# EAGLE board mapleCUx_large_042b (EAGLE 7.3.0)
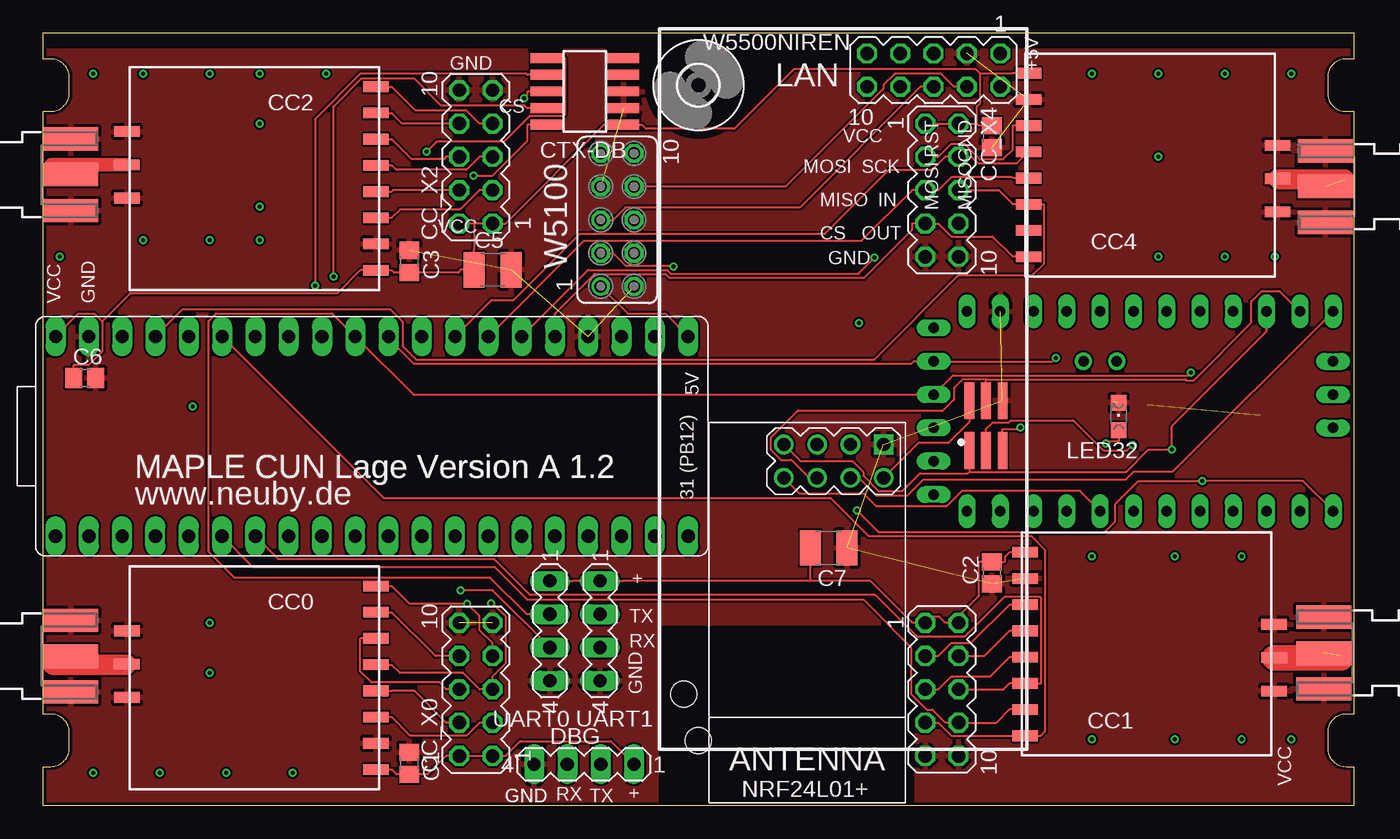
[diagram p0: board, top side]
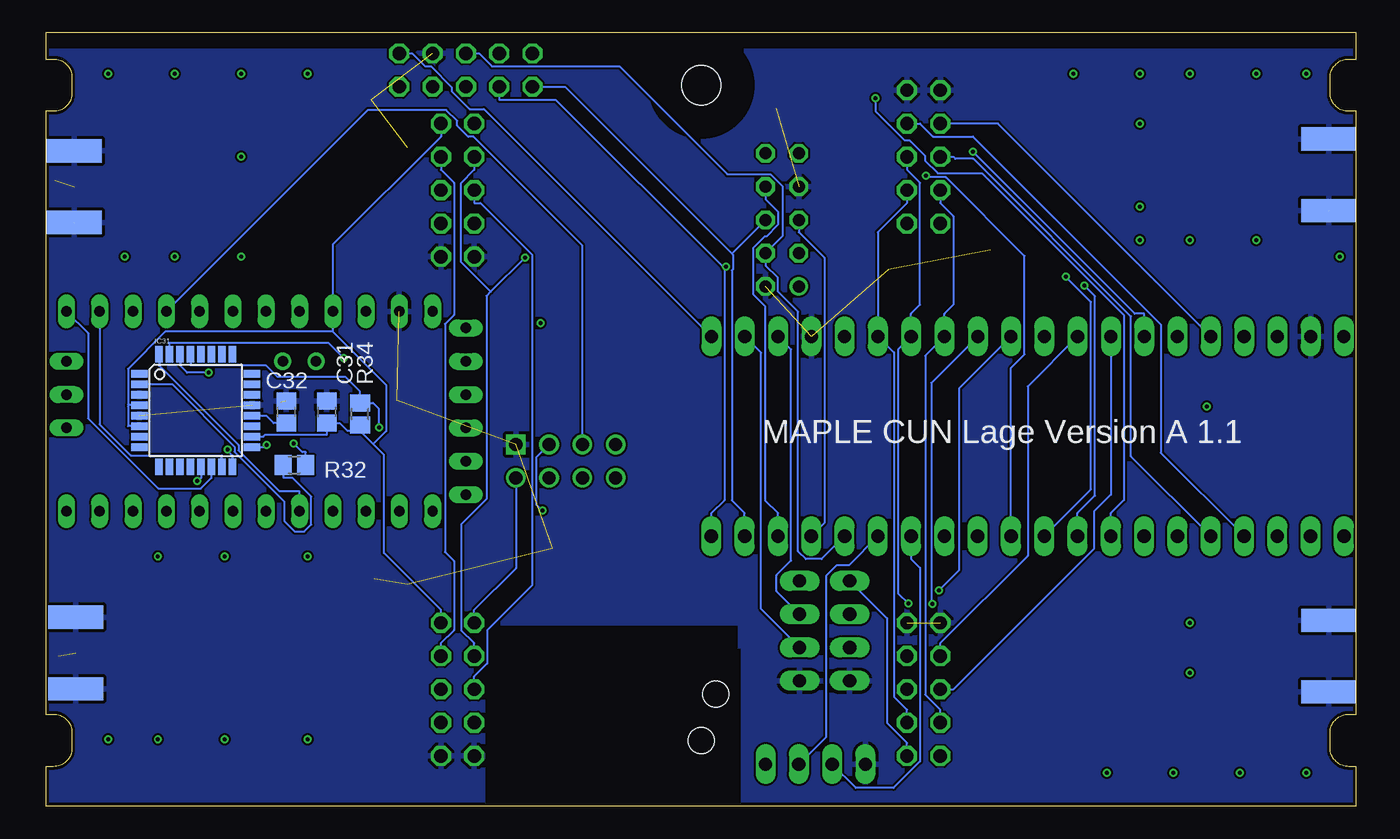
[diagram p1: board, bottom side, seen from below]

Size 100 x 59 mm. Coordinates in mm from the lower left corner, seen from the top.
Outline: 0,0 0,3 0.59,3 arc90 2,4.41 2,5.59 arc90 0.59,7 0,7 0,53 0.59,53 arc90 2,54.41 2,55.59 arc90 0.59,57 0,57 0,59 100,59 100,57 99.41,57 arc90 98,55.59 98,54.41 arc90 99.41,53 100,53 100,7 99.41,7 arc90 98,5.59 98,4.41 arc90 99.41,3 100,3 100,0 0,0
Copper layers (1*16): Top 0.035mm / dielectric 1.5mm / Bottom 0.035mm
Design rules "SeeedStudio_2layer_DRU_no_angle_20140221": minimum track width 6mil, minimum drill 12mil, track to track 6mil, track to pad 6mil, pad to pad 6mil, via to via 6mil, smd to smd 0mil, copper to edge 10mil, drill to drill 10mil, minimum pad ring 10mil, minimum via ring 6mil, stop-mask expansion 2mil, vias tented up to drill 100mil, thermal gap 10mil
Net classes: 1 PWR: width 0.305 mm
Holes 2 mm at 48.9,8.53 50,5
tRestrict: area 0,58 to 100,59; area 47,0 to 66,12
bRestrict: area 0,58 to 100,59; area 0,58 to 100,59; area 47,0 to 66,12

## Footprints (pad centres in the part's own frame; a part is rotated, then mirrored left to right if it is on the bottom)
C0805 = smd 1.3 x 1.5: 1 -0.85,0; 2 0.85,0
C1210 = smd 1.6 x 2.7: 1 -1.4,0; 2 1.4,0
CC1101_MODULE1_SMD = smd 1.93 x 0.813: ANT 19,5.96; CSN 0,0; GDO0 0,2; GDO2 0,4; GND@0 0,12; GND@1 19,8.5; GND@2 19,3.42; MISO 0,6; MOSI 0,10; SCLK 0,8; VCC 0,14
MA05-2 = drill 1.016 octagon: 1 -5.08,-1.27; 2 -5.08,1.27; 3 -2.54,-1.27; 4 -2.54,1.27; 5 0,-1.27; 6 0,1.27; 7 2.54,-1.27; 8 2.54,1.27; 9 5.08,-1.27; 10 5.08,1.27
1365-10 = smd 0.76 x 2.4: 1 -2.54,-2.95; 2 -2.54,2.95; 3 -1.27,-2.95; 4 -1.27,2.95; 5 0,-2.95; 6 0,2.95; 7 1.27,-2.95; 8 1.27,2.95; 9 2.54,-2.95; 10 2.54,2.95
MA04-1 = drill 1.016 long: 1 -3.81,0; 2 -1.27,0; 3 1.27,0; 4 3.81,0
3,0 = hole 3: 0,0
TQFP32-08 = smd 1.27 x 0.559: 1 -4.293,2.8; 2 -4.293,2; 3 -4.293,1.2; 4 -4.293,0.4; 5 -4.293,-0.4; 6 -4.293,-1.2; 7 -4.293,-2; 8 -4.293,-2.8; 17 4.293,-2.8; 18 4.293,-2; 19 4.293,-1.2; 20 4.293,-0.4; 21 4.293,0.4; 22 4.293,1.2; 23 4.293,2; 24 4.293,2.8 | smd 0.559 x 1.27: 9 -2.8,-4.293; 10 -2,-4.293; 11 -1.2,-4.293; 12 -0.4,-4.293; 13 0.4,-4.293; 14 1.2,-4.293; 15 2,-4.293; 16 2.8,-4.293; 25 2.8,4.293; 26 2,4.293; 27 1.2,4.293; 28 0.4,4.293; 29 -0.4,4.293; 30 -1.2,4.293; 31 -2,4.293; 32 -2.8,4.293
CHIPLED_0805 = smd 1.2 x 1.2: A 0,-1.05; C 0,1.05
WIRELESS-NRF24L01 = drill 1 square: 1 -12.7,6.35 | drill 1: 2 -10.16,6.35; 3 -12.7,3.81; 4 -10.16,3.81; 5 -12.7,1.27; 6 -10.16,1.27; 7 -12.7,-1.27; 8 -10.16,-1.27
R0805 = smd 1.3 x 1.5: 1 -0.85,0; 2 0.85,0
20-DIP = drill 1.016 pad 1.27 long: 1 -24.13,-7.62; 2 -21.59,-7.62; 3 -19.05,-7.62; 4 -16.51,-7.62; 5 -13.97,-7.62; 6 -11.43,-7.62; 7 -8.89,-7.62; 8 -6.35,-7.62; 9 -3.81,-7.62; 10 -1.27,-7.62; 11 1.27,-7.62; 12 3.81,-7.62; 13 6.35,-7.62; 14 8.89,-7.62; 15 11.43,-7.62; 16 13.97,-7.62; 17 16.51,-7.62; 18 19.05,-7.62; 19 21.59,-7.62; 20 24.13,-7.62 | drill 1 pad 1.27 long: 21 24.13,7.62; 22 21.59,7.62; 23 19.05,7.62; 24 16.51,7.62; 25 13.97,7.62; 26 11.43,7.62; 27 8.89,7.62; 28 6.35,7.62; 29 3.81,7.62; 30 1.27,7.62; 31 -1.27,7.62; 32 -3.81,7.62; 33 -6.35,7.62; 34 -8.89,7.62; 35 -11.43,7.62; 36 -13.97,7.62; 37 -16.51,7.62; 38 -19.05,7.62; 39 -21.59,7.62; 40 -24.13,7.62
ABK-PRO-MINI = drill 0.8 long: A0 10.16,-3.81; A1 10.16,-6.35; A2 10.16,-8.89; A3 10.16,-11.43; A6 3.81,-21.59; A7 6.35,-21.59; D2 -5.08,-3.81; D3 -5.08,-6.35; D4 -5.08,-8.89; D5 -5.08,-11.43; D6 -5.08,-13.97; D7 -5.08,-16.51; D8 -5.08,-19.05; D9 -5.08,-21.59; D10 10.16,-21.59; D11 10.16,-19.05; D12 10.16,-16.51; D13 10.16,-13.97; DTR 8.89,8.89; GND 10.16,3.81; GND1 -5.08,-1.27; GND2 -3.81,8.89; GND3 -1.27,8.89; GND4 1.27,-21.59; RAW 10.16,6.35; RST 10.16,1.27; RST1 -5.08,1.27; RX1 -5.08,3.81; RX1-1 3.81,8.89; TX0 -5.08,6.35; TX0-1 6.35,8.89; VCC 10.16,-1.27; VCC1 1.27,8.89 | drill 0.8: A4 6.35,-5.08; A5 6.35,-2.54
FE05-2 = drill 0.914: 1 -5.08,1.27 | drill 0.914 octagon: 2 -5.08,-1.27; 3 -2.54,1.27; 4 -2.54,-1.27; 5 0,1.27; 6 0,-1.27; 7 2.54,1.27; 8 2.54,-1.27; 9 5.08,1.27; 10 5.08,-1.27
SMA = smd 4.191 x 1.778: 1 2.115,0; GND@1 2.115,2.733; GND@2 2.115,-2.733 | smd 4.191 x 1.778 bottom: GND@3 2.115,2.733; GND@4 2.115,-2.733
2X03-1.27MM_SMD = smd 0.75 x 2.8: P$1 -1.27,-1.905; P$2 -1.27,1.905; P$3 0,-1.905; P$4 0,1.905; P$5 1.27,-1.905; P$6 1.27,1.905

## Placement (x,y rotation side)
C1  22pF  [C0805]  27.94,3.25 270 top
C2  22pF  [C0805]  72.39,17.78 90 top
C3  22pF  [C0805]  27.94,41.55 270 top
C4  22pF  [C0805]  72.39,51.07 90 top
C5  10uF  [C1210]  34.29,40.91 0 top
C6  22pF  [C0805]  3.17,32.66 0 top
C7  4,7  [C1210]  59.95,19.68 180 top
C31  100n  [C0805]  78.56,30.06 90 bottom
C32  100n  [C0805]  81.64,30.06 90 bottom
CC0  CC1101_MODULE1SMD  [CC1101_MODULE1_SMD]  25.4,16.78 180 top
CC1  CC1101_MODULE1SMD  [CC1101_MODULE1_SMD]  74.93,5.35 0 top
CC2  CC1101_MODULE1SMD  [CC1101_MODULE1_SMD]  25.4,54.88 180 top
CC4  CC1101_MODULE1SMD  [CC1101_MODULE1_SMD]  75.18,41.91 0 top
CC_X0  [MA05-2]  33.02,8.89 90 top
CC_X1  [MA05-2]  68.58,8.89 270 top
CC_X2  [MA05-2]  33.02,49.53 90 top
CC_X4  [MA05-2]  68.58,46.99 270 top
CTX-DB  1365-10  [1365-10]  41.33,54.52 90 top
DBG  [MA04-1]  41.27,3.17 180 top
H6  MOUNT-HOLE3.0  [3,0]  50,55 0 top
IC31  ATMEGA168-TQFP  [TQFP32-08]  88.56,30.18 0 bottom
LED32  [CHIPLED_0805]  82.06,29.72 0 top
NRF24L01+  NRF24L01+  [WIRELESS-NRF24L01]  57.78,14.88 270 top
R32  1k  [R0805]  81.02,26.02 0 bottom
R34  [R0805]  76.02,29.9 90 bottom
U$1  MAPLEMINI  [20-DIP]  25.08,28.21 0 top
U$2  ABK-PRO-MINI  [ABK-PRO-MINI]  76.83,27.57 90 top
UART0  [MA04-1]  38.66,13.36 270 top
UART1  [MA04-1]  42.49,13.36 270 top
W5100  [FE05-2]  43.81,44.72 90 top
W5500NIREN  [MA05-2]  67.94,56.15 180 top
X1  SMA  [SMA]  99.82,11.67 180 top
X2  SMA  [SMA]  0,11.43 0 top
X3  SMA  [SMA]  0,48.16 0 top
X4  SMA  [SMA]  99.95,47.26 180 top
X31  M03X2  [2X03-1.27MM_SMD]  71.94,29.02 0 top

## Library data of the parts
C1-C7 C31 C32 R32 R34 = rcl
CC0 CC1 CC2 CC4 = wireless
CC_X0 CC_X1 CC_X2 CC_X4 DBG UART0 UART1 W5500NIREN = con-lstb; OC_FARNELL: unknown; OC_NEWARK: unknown
CTX-DB = con-leotronics; OC_FARNELL: unknown; OC_NEWARK: unknown
H6 = holes
IC31 = atmel
LED32 = led
NRF24L01+ = diy-modules
U$1 = maplemini-small
U$2 = Arduino-clone
W5100 = con-lsta; OC_FARNELL: unknown; OC_NEWARK: unknown
X1-X4 = sma
X31 = mechanics

## Nets
+5V: U$1.21 W5100.1 W5500NIREN.1
CC_CS0: CC0.CSN CC_X0.7 U$1.29
CC_CS1: CC1.CSN CC_X1.7 U$1.35
CC_CS2: CC2.CSN CC_X2.7 U$1.4
CC_CS3: CC4.CSN CC_X4.7 U$1.25
CC_IN_0: CC0.GDO2 CC_X0.6 U$1.33
CC_IN_1: CC1.GDO2 CC_X1.6 U$1.7
CC_IN_2: CC2.GDO2 CC_X2.6 U$1.5
CC_IN_3: CC4.GDO2 CC_X4.6 U$1.37
CC_OUT_0: CC0.GDO0 CC_X0.8 U$1.32
CC_OUT_1: CC1.GDO0 CC_X1.8 U$1.6
CC_OUT_2: CC2.GDO0 CC_X2.8 U$1.36
CE-A: IC31.13 NRF24L01+.3 U$2.D9
CSN-A: IC31.14 NRF24L01+.4 U$2.D10
GND: C1.1 C2.1 C3.1 C4.1 C5.2 C6.2 C7.1 C31.2 C32.2 CC0.GND@0 CC0.GND@1 CC0.GND@2 CC1.GND@0 CC1.GND@1 CC1.GND@2 CC2.GND@0 CC2.GND@1 CC2.GND@2 CC4.GND@0 CC4.GND@1 CC4.GND@2 CC_X0.9 CC_X0.10 CC_X1.9 CC_X1.10 CC_X2.9 CC_X2.10 CC_X4.9 CC_X4.10 CTX-DB.3 CTX-DB.5 DBG.4 IC31.3 IC31.5 IC31.21 LED32.C NRF24L01+.1 U$1.24 U$1.39 U$2.GND UART0.4 UART1.4 W5100.2 W5100.7 W5500NIREN.3 X1.GND@1 X1.GND@2 X1.GND@3 X1.GND@4 X2.GND@1 X2.GND@2 X2.GND@3 X2.GND@4 X3.GND@1 X3.GND@2 X3.GND@3 X3.GND@4 X4.GND@1 X4.GND@2 X4.GND@3 X4.GND@4 X31.P$6
IRQ-A: IC31.32 NRF24L01+.8 U$2.D2
M-RES: IC31.29 R34.2 X31.P$5
M-SCK: IC31.17 X31.P$3
MISO1: CC0.MISO CC1.MISO CC2.MISO CC4.MISO CC_X0.5 CC_X1.5 CC_X2.5 CC_X4.5 U$1.27
MISO2: U$1.18 W5100.8 W5500NIREN.4
MISO-A: IC31.16 NRF24L01+.7 U$2.D12 X31.P$1
MOSI1: CC0.MOSI CC1.MOSI CC2.MOSI CC4.MOSI CC_X0.3 CC_X1.3 CC_X2.3 CC_X4.3 U$1.26
MOSI-A: IC31.15 NRF24L01+.6 U$2.D11 X31.P$4
N$1: CC2.ANT X3.1
N$2: CC4.ANT X4.1
N$3: CC1.ANT X1.1
N$4: CC0.ANT X2.1
N$5: LED32.A R32.2
N$8: CTX-DB.7
N$15: C32.1 IC31.20
NC: CTX-DB.9
NRESET: CTX-DB.10 U$1.34
RST: U$1.17 W5100.5 W5500NIREN.6
RX1: U$1.22 UART1.3
RX-MAPLE: IC31.31 U$1.30 U$2.TX0-1 UART0.3
RX_DBG: DBG.3 U$1.14
RX_LED: IC31.2 R32.1
SCK1: CC0.SCLK CC1.SCLK CC2.SCLK CC4.SCLK CC_X0.4 CC_X1.4 CC_X2.4 CC_X4.4 U$1.28
SCK2: U$1.19 W5100.6 W5500NIREN.10
SCK-A: NRF24L01+.5 U$2.D13
SWCLK/TCK: CTX-DB.4 U$1.10
SWDIO/TMS: CTX-DB.2 U$1.11
SWO/TDO: CTX-DB.6 U$1.8
TDI: CTX-DB.8 U$1.9
TX1: U$1.23 UART1.2
TX-MAPLE: IC31.30 U$1.31 U$2.RX1-1 UART0.2
TX_DBG: DBG.2 U$1.15
VCC: C1.2 C2.2 C3.2 C4.2 C5.1 C6.1 C7.2 C31.1 CC0.VCC CC1.VCC CC2.VCC CC4.VCC CC_X0.1 CC_X0.2 CC_X1.1 CC_X1.2 CC_X2.1 CC_X2.2 CC_X4.1 CC_X4.2 CTX-DB.1 DBG.1 IC31.4 IC31.6 IC31.18 NRF24L01+.2 R34.1 U$1.40 U$2.VCC UART0.1 UART1.1 X31.P$2
WIZ_CS: U$1.20 W5100.3 W5500NIREN.8
WIZ_RST: U$1.16 W5100.4 W5500NIREN.5

## Tracks (layer width: path | path; a pad name or v marks a point on that pad's centre or on a via)
+5V
  Top 0.152: W5100.1 44.62,37.57 47.48,37.57 U$1.21
  Bottom 0.152: W5500NIREN.1 72.03,57.42 71.04,56.43 70.61,56.43 69.03,54.84 69.03,54.56 67.64,53.17 66.56,53.17 U$1.21
CC_CS0  (via drill 0.3 pad 0.61)
  Top 0.152: CC0.CSN 26.59,16.78 27.95,15.43 v32.35,15.43 33.3,14.48 33.3,13.41 34.29,12.42 CC_X0.7
  Bottom 0.152: U$1.29 32.44,32.29 32.44,15.51 v32.35,15.43
CC_CS1
  Top 0.152: U$1.35 25.98,23.5 60.07,23.5 62.99,20.59 75.39,20.59 76.45,19.53 76.45,5.67 76.12,5.35 CC1.CSN 69.3,5.35 68.3,6.35 CC_X1.7
CC_CS2
  Top 0.152: CC2.CSN 26.59,54.88 28.41,53.06 32.31,53.06 33.3,52.07 CC_X2.7
  Bottom 0.152: U$1.4 14.92,26.94 14.92,36.75 29.25,51.08 32.31,51.08 33.3,52.07 CC_X2.7
CC_CS3
  Top 0.152: U$1.25 39.05,37.57 42.07,40.59 47.49,40.59 47.76,40.31 62.66,40.31 66.32,43.98 66.32,44.45 CC_X4.7 68.3,44.45 69.29,43.46 72.44,43.46 73.99,41.91 CC4.CSN
CC_IN_0
  Top 0.152: CC0.GDO2 24.21,12.78 24.21,10.26 25.05,9.41 30.23,9.41 30.76,8.89 CC_X0.6
  Bottom 0.152: CC_X0.6 30.76,8.89 20.03,19.62 20.03,22.46 18.73,23.75 U$1.33
CC_IN_1
  Top 0.152: U$1.7 17.95,18.84 34.39,18.84 37.11,16.12 63.48,16.12 66.67,12.94 70.32,12.94 73.37,15.98 76.04,15.98 76.12,15.9 76.12,9.35 CC1.GDO2 73.74,9.35 73.28,8.89 CC_X1.6
CC_IN_2
  Top 0.152: CC2.GDO2 26.59,50.88 28.12,49.35 30.58,49.35 30.76,49.53 CC_X2.6
  Bottom 0.152: CC_X2.6 30.76,49.53 30.61,49.38 29.24,49.38 17.2,37.34 17.2,26.68 U$1.5
CC_IN_3
  Top 0.152: U$1.37 10.64,37.9 26.48,37.9 27.42,36.96 27.42,35.1 28.45,34.08 63.42,34.08 69.83,40.49 75.48,40.49 76.38,41.38 76.38,45.91 CC4.GDO2 73.99,45.91 72.91,46.99 CC_X4.6
CC_OUT_0
  Top 0.152: CC0.GDO0 26.59,14.78 29.94,11.43 CC_X0.8
  Bottom 0.152: CC_X0.8 31.75,12.42 25.08,19.09 25.08,32.02 U$1.32
CC_OUT_1
  Top 0.152: U$1.6 16.01,18.23 34.43,18.23 36.92,15.74 62.58,15.74 66.23,12.1 66.23,8.54 67.43,7.34 67.87,7.34 68.86,6.35 CC_X1.8 72.74,6.35 73.74,7.35 CC1.GDO0
CC_OUT_2
  Top 0.152: CC2.GDO0 26.59,52.88 27.4,52.07 CC_X2.8
  Bottom 0.152: U$1.36 27.35,52.07 CC_X2.8
CE-A  (via drill 0.3 pad 0.61)
  Top 0.152: v62.11,22.53 63.75,20.9 81.02,20.9 81.81,21.69 81.81,23.04 83.56,24.79 v88.44,24.79 96.13,24.79 U$2.D9
  Bottom 0.152: NRF24L01+.3 62.58,26.59 62.58,23 v62.11,22.53 | IC31.13 88.16,25.02 88.2,25.02 v88.44,24.79
CSN-A
  Top 0.152: NRF24L01+.4 62.23,25.04 63.56,23.71 65.96,23.71 67.16,24.91 82.63,24.91 83.22,25.5 86.19,25.5 U$2.D10
  Bottom 0.152: IC31.14 87.36,25.02 88.18,24.21 91.4,24.21 96.77,29.57 96.77,36.08 U$2.D10
GND  (16 unrouted)
  pour Bottom: 0,59 0,0 46.99,0 46.99,13.97 66.67,13.97 66.67,0 100,0 100,59
  pour Top: 0,0 0,59 100,59 100,0 66.67,0 66.67,13.97 46.99,13.97 46.99,0
IRQ-A
  Top 0.152: U$2.D2 79.11,24.04 70.12,24.04 68.94,22.86 63.59,22.86 62.64,23.81 57.74,23.81 NRF24L01+.8
  Bottom 0.152: IC31.32 91.36,33.6 85.29,27.53 85.29,27.14 82.18,24.03 80.64,24.03 U$2.D2
M-RES  (via drill 0.3 pad 0.61)
  Top 0.152: X31.P$5 73.21,28.74 74.44,28.74 v74.57,28.88
  Bottom 0.152: v74.57,28.88 74.57,30.28 75.04,30.75 R34.2 76.02,31.63 77.13,32.74 82.31,32.74 83.19,33.61 88.96,33.61 IC31.29
M-SCK  (via drill 0.3 pad 0.61)
  Top 0.152: v83.15,27.55 82.7,27.11 80.9,27.11 78.59,29.41 73.85,29.41 73.69,29.26 72.45,29.26 71.94,28.74 X31.P$3
  Bottom 0.152: IC31.17 83.4,27.38 83.23,27.55 v83.15,27.55
MISO1  (via drill 0.3 pad 0.61)
  Top 0.152: U$1.27 41.26,43.12 62.45,43.12 66.32,46.99 CC_X4.5 68.3,46.99 69.33,48.01 73.89,48.01 73.99,47.91 CC4.MISO | v34.17,15.44 34.31,15.44 35.28,14.46 35.28,10.87 34.29,9.88 CC_X0.5 33.3,8.89 32.04,10.14 27.23,10.14 26.59,10.78 CC0.MISO | CC1.MISO 73.74,11.35 72.27,9.88 69.29,9.88 68.3,8.89 CC_X1.5 | CC2.MISO 26.59,48.88 26.93,48.54 32.31,48.54 33.3,49.53 CC_X2.5
  Bottom 0.152: v34.17,15.44 34.97,16.23 34.97,34.83 U$1.27 33.97,36.7 33.97,37.57 33.3,38.24 33.3,47.55 34.29,48.54 CC_X2.5 | CC_X1.5 67.31,9.88 66.32,10.87 66.32,13.41 62.91,16.82 62.91,42.07 66.83,46 67.31,46 CC_X4.5
MISO2
  Top 0.152: W5500NIREN.4 69.49,54.88 68.49,55.88 64.99,55.88 64.14,55.03 64.14,54.74 56.65,47.26 W5100.8
  Bottom 0.152: U$1.18 44.13,22.34 45.12,23.32 45.12,38.13 46.03,39.04 46.03,42.57 45.15,43.45 45.03,43.45 44.11,44.36 44.11,45.35 45.09,46.32 W5100.8
MISO-A  (via drill 0.3 pad 0.61)
  Top 0.152: 70.67,25.49 82.63,25.49 84.33,27.18 v86.13,27.18 86.13,28.98 93.34,36.2 U$2.D12 | NRF24L01+.7 57.78,26.3 61.75,26.3 62.58,25.47 62.58,25.2 63.74,24.03 65.56,24.03 66.9,25.37 70.56,25.37 70.67,25.49 | X31.P$1 70.67,25.49
  Bottom 0.152: v86.13,27.18 86.13,27.11 85.76,26.75 IC31.16
MOSI1  (via drill 0.3 pad 0.61)
  Top 0.152: CC4.MOSI 73.99,51.91 73.99,50.09 73.24,49.34 71.46,49.34 70.28,50.52 69.29,50.52 68.3,49.53 CC_X4.3 | U$1.26 41.57,40.89 47.62,40.89 47.89,40.62 62.21,40.62 v63.44,41.85 | CC1.MOSI 73.74,15.35 70.81,12.42 69.29,12.42 68.3,11.43 CC_X1.3 | CC2.MOSI 26.59,44.88 27.23,45.52 31.82,45.52 33.3,46.99 CC_X2.3 | CC0.MOSI 26.59,6.78 28.02,5.36 32.31,5.36 33.3,6.35 CC_X0.3
  Bottom 0.152: 66.05,39.24 66.37,38.92 66.37,23.41 68.3,21.49 68.3,13.41 67.31,12.42 CC_X1.3 | v63.44,41.85 66.05,39.24 | 66.05,39.24 68.35,41.53 68.35,47.5 67.31,48.54 CC_X4.3 | CC_X0.3 34.29,7.34 35.28,8.33 35.28,34.6 U$1.26 36.51,43.78 34.29,46 CC_X2.3
MOSI-A
  Top 0.152: 71.94,32.55 87.16,32.55 87.24,32.47 87.78,32.47 92.18,36.87 92.18,38.49 92.99,39.3 94.32,39.3 U$2.D11 | X31.P$4 71.94,32.55 | 71.94,32.55 70.16,32.55 69.5,31.89 69.5,31 68.61,30.11 57.56,30.11 55.51,28.06 55.51,27.19 56.29,26.41 57.09,26.41 58.46,25.04 NRF24L01+.6
  Bottom 0.152: IC31.15 86.56,26.75 93.51,26.75 95.89,29.12 U$2.D11
N$1
  Top 1.016: CC2.ANT 0.64,48.92 0.64,48.9 2.12,48.9 X3.1
N$2  (1 unrouted)
  Top 1.422: CC4.ANT 99.31,47.87 99.31,47.75 94.23,47.75
N$3  (1 unrouted)
  Top 1.93: CC1.ANT 99.06,11.31 99.06,11.43
N$4
  Top 1.422: CC0.ANT 0.64,10.82 0.64,10.79 2.12,10.79 X2.1
N$5  (via drill 0.3 pad 0.61)
  Top 0.152: LED32.A 82.06,27.84 81.26,27.84 v81.09,27.67
  Bottom 0.152: R32.2 80.17,27 80.42,27 v81.09,27.67
N$6  (via drill 0.3 pad 0.61)
  other vias: 3.81,55.88
N$7  (via drill 0.3 pad 0.61)
  other vias: 1.27,41.91
N$9  (via drill 0.3 pad 0.61)
  other vias: 3.81,2.54
N$10  (via drill 0.3 pad 0.61)
  other vias: 8.89,2.54
N$11  (via drill 0.3 pad 0.61)
  other vias: 13.97,2.54
N$12  (via drill 0.3 pad 0.61)
  other vias: 19.05,2.54
N$13  (via drill 0.3 pad 0.61)
  other vias: 7.62,55.88
N$14  (via drill 0.3 pad 0.61)
  other vias: 12.7,55.88
N$15
  Bottom 0.152: C32.1 82.62,29.21 83.19,29.78 IC31.20
N$16  (via drill 0.3 pad 0.61)
  other vias: 95.25,55.88
N$17  (via drill 0.3 pad 0.61)
  other vias: 90.17,55.88
N$18  (via drill 0.3 pad 0.61)
  other vias: 85.09,55.88
N$19  (via drill 0.3 pad 0.61)
  other vias: 80.01,55.88
N$20  (via drill 0.3 pad 0.61)
  other vias: 85.09,41.91
N$21  (via drill 0.3 pad 0.61)
  other vias: 86.36,19.05
N$22  (via drill 0.3 pad 0.61)
  other vias: 95.25,5.08
N$23  (via drill 0.3 pad 0.61)
  other vias: 91.44,5.08
N$24  (via drill 0.3 pad 0.61)
  other vias: 90.17,41.91
N$25  (via drill 0.3 pad 0.61)
  other vias: 80.01,5.08
N$26  (via drill 0.3 pad 0.61)
  other vias: 62.23,36.83
N$27  (via drill 0.3 pad 0.61)
  other vias: 16.51,45.72
N$28  (via drill 0.3 pad 0.61)
  other vias: 12.7,13.97
N$29  (via drill 0.3 pad 0.61)
  other vias: 11.43,30.48
N$30  (via drill 0.3 pad 0.61)
  other vias: 85.09,49.53
N$31  (via drill 0.3 pad 0.61)
  other vias: 80.01,19.05
N$32  (via drill 0.3 pad 0.61)
  other vias: 86.36,5.08
N$33  (via drill 0.3 pad 0.61)
  other vias: 91.44,19.05
N$35  (via drill 0.3 pad 0.61)
  other vias: 16.51,43.18
N$36  (via drill 0.3 pad 0.61)
  other vias: 21.59,55.88
N$37  (via drill 0.3 pad 0.61)
  other vias: 16.51,55.88
N$38  (via drill 0.3 pad 0.61)
  other vias: 12.7,10.16
N$39  (via drill 0.3 pad 0.61)
  other vias: 93.98,41.91
N$40  (via drill 0.3 pad 0.61)
  other vias: 16.51,52.07
N$41  (via drill 0.3 pad 0.61)
  other vias: 12.7,43.18
N$42  (via drill 0.3 pad 0.61)
  other vias: 7.62,43.18
N$43
  Top 1.422: 0.76,10.67 6.35,10.67
NRESET  (via drill 0.3 pad 0.61)
  Top 0.152: v29.26,49.91 30.02,50.67 35.16,50.67 37.13,52.64 39.73,52.64 39.81,52.73 39.81,57.06 CTX-DB.10
  Bottom 0.152: U$1.34 16.19,37.57 16.91,37.57 v29.26,49.91
RST
  Top 0.152: W5100.5 43.48,44.72 44.42,45.66 57.73,45.66 66.95,54.88 W5500NIREN.6
  Bottom 0.152: W5100.5 42.55,43.78 40.59,41.83 40.59,21.59 U$1.17
RX1
  Bottom 0.152: UART1.3 45.42,15.02 45.42,34.58 U$1.22
RX-MAPLE  (via drill 0.3 pad 0.61)
  Top 0.152: U$1.30 26.35,35.67 28.26,33.77 66.25,33.77 66.41,33.92 U$2.TX0-1 77.01,33.92 v77.27,34.18 | UART0.3 34.3,16.45 v31.87,16.45
  Bottom 0.152: IC31.31 90.56,35.34 78.42,35.34 v77.27,34.18 | v31.87,16.45 30.31,18.01 30.31,31.88 U$1.30
RX_DBG
  Bottom 0.152: U$1.14 33.97,18.84 33.3,18.16 33.3,3.38 35.32,1.37 38.2,1.37 DBG.3
RX_LED
  Bottom 0.152: IC31.2 90.37,32.18 85.59,27.41 85.59,27.01 81.81,23.23 81.81,21.75 81,20.94 80.28,20.94 79.75,21.47 79.75,23.61 81.18,25.04 81.87,25.04 R32.1
SCK1
  Top 0.152: U$1.28 34.2,38.6 35.89,38.6 40.96,43.67 59.66,43.67 64.53,48.54 67.87,48.54 68.86,49.53 CC_X4.4 70.84,49.53 71.34,49.03 74.31,49.03 CC4.SCLK | CC1.SCLK 73.74,13.35 71.82,11.43 CC_X1.4 | CC2.SCLK 26.59,46.88 26.7,46.99 CC_X2.4 | CC0.SCLK 26.59,8.78 28.33,8.78 30.76,6.35 CC_X0.4
  Bottom 0.152: CC_X1.4 69.85,12.42 68.86,13.41 68.86,18.69 69.55,19.38 69.55,36.77 68.86,37.46 68.86,47.55 69.85,48.54 CC_X4.4 | CC_X2.4 31.75,46 30.75,45 30.75,38.25 31.43,37.57 U$1.28 32.9,34.36 32.9,8.49 31.75,7.34 CC_X0.4
SCK2
  Bottom 0.152: 47.66,42.15 47.57,42.07 47.57,40.93 47.66,40.85 47.66,23.32 46.67,22.34 U$1.19 | W5100.6 47.66,42.15 | W5500NIREN.10 60.38,54.88 47.66,42.15
SCK-A
  Bottom 0.152: NRF24L01+.5 59.05,42.75 67.37,51.07 67.76,51.07 68.6,51.91 68.6,52.27 69.44,53.11 75.43,53.11 U$2.D13
SWCLK/TCK  (via drill 0.3 pad 0.61)
  Top 0.152: v22.15,40.4 22.15,53.37 24.29,55.52 28.29,55.52 30.32,53.49 36.72,53.49 36.95,53.25 CTX-DB.4
  Bottom 0.152: U$1.10 20.25,24.15 20.25,38.45 22.15,40.35 v22.15,40.4
SWDIO/TMS  (via drill 0.3 pad 0.61)
  Top 0.152: CTX-DB.2 36.95,51.98 36.95,50.76 34.3,48.11 v32.86,48.11
  Bottom 0.152: U$1.11 26.35,33.42 25.32,34.45 25.32,41.96 31.34,47.98 32.73,47.98 v32.86,48.11
SWO/TDO  (via drill 0.3 pad 0.61)
  Top 0.152: CTX-DB.6 36.95,54.52 36.95,54.29 v36.68,54.02
  Bottom 0.152: v36.68,54.02 36.68,53.01 34.47,50.8 34.1,50.8 32.91,49.61 32.91,49.26 31.94,48.29 28.57,48.29 17.74,37.45 17.74,23.33 18.73,22.34 U$1.8
TDI  (via drill 0.3 pad 0.61)
  Top 0.152: v20.75,39.71 20.75,52.41 24.2,55.86 36.89,55.86 36.95,55.79 CTX-DB.8
  Bottom 0.152: U$1.9 21.27,22.34 19.94,23.67 19.94,38.9 v20.75,39.71
TX1
  Bottom 0.152: UART1.2 44.24,16.38 44.24,17.62 43.14,18.72 43.14,34.84 U$1.23
TX-MAPLE  (via drill 0.3 pad 0.61)
  Top 0.152: v87.58,33.06 87.37,32.86 69.42,32.86 U$2.RX1-1 28.26,31.39 U$1.31 22.06,37.59 13.2,37.59 12.63,37.01 12.63,19.38 14.6,17.41 34.12,17.41 36.91,14.62 UART0.2
  Bottom 0.152: IC31.30 89.76,33.61 89.22,33.06 v87.58,33.06
TX_DBG
  Bottom 0.152: U$1.15 38.73,18.37 39.66,18.37 40.47,17.55 40.47,5.25 DBG.2
VCC
  Top 0.152: CC0.VCC 26.59,2.78 26.96,2.41 26.96,2.4 C1.2 29.35,2.4 30.76,3.81 CC_X0.2 CC_X0.1 35.28,3.81 36.41,4.94 43.32,4.94 DBG.1 | 32.89,44.45 CC_X2.2 | 32.89,44.45 CC_X2.1 35.28,44.45 42.81,51.98 CTX-DB.1 45.71,51.98 46.02,51.67 52.74,51.67 57.29,56.22 71.16,56.22 71.51,55.87 | 32.89,44.45 32.89,42.49 C5.1 31.86,40.91 31.65,40.7 C3.2 26.78,40.7 26.59,40.88 CC2.VCC 24.21,40.88 22.46,39.14 6.68,39.14 4.5,36.96 | 58.55,17.16 58.55,18.25 C7.2 | 58.55,17.16 63.12,17.16 66.32,13.97 CC_X1.1 67.31,14.46 68.36,14.46 68.86,13.97 69.36,13.97 | 58.55,17.16 44.24,17.16 UART1.1 40.42,17.16 UART0.1 | X31.P$2 70.67,29.3 69.06,27.68 66.78,27.68 NRF24L01+.2 | 69.36,13.97 71.41,16.03 71.41,18.63 C2.2 73.37,18.63 73.37,18.98 73.74,19.35 CC1.VCC | 4.5,36.96 4.5,34.66 3.48,33.63 2.33,33.63 C6.1 | U$1.40 2.69,37.57 3.9,37.57 4.5,36.96 | 71.51,55.87 71.55,55.91 73.99,55.91 CC4.VCC | 71.26,52.07 71.26,53.4 71.51,53.64 71.51,55.87 | 71.26,52.07 71.41,51.92 C4.2 | 71.26,52.07 CC_X4.2 CC_X4.1 | CC_X1.2 69.36,13.97
  Bottom 0.152: 75.02,27.61 76.02,28.61 | 75.02,27.61 74.19,26.78 74.19,19.3 69.85,14.96 CC_X1.2 | 78.11,36.2 74.02,32.12 74.02,28.6 75.02,27.61 | 78.11,36.2 90.87,36.2 93.72,33.35 93.72,30.66 93.64,30.58 | IC31.18 83.4,28.18 83.25,28.33 78.56,28.33 C31.1 77.58,29.21 76.98,28.61 76.02,28.61 | R34.1 76.02,28.61 | 78.11,36.2 U$2.VCC 78.11,42.82 69.85,51.08 CC_X4.2 | IC31.6 93.72,28.98 93.72,30.5 93.64,30.58 | IC31.4 93.64,30.58 | CC_X1.1 67.31,14.96 64.14,18.14 NRF24L01+.2 | CC_X0.1 34.29,4.8 35.81,6.33 35.81,14.31 UART0.1
WIZ_CS  (via drill 0.3 pad 0.61)
  Top 0.152: W5100.3 43.48,42.18 44.42,41.24 48.02,41.24 v48.11,41.15
  Bottom 0.152: 48.23,41.03 48.23,23.32 49.21,22.34 U$1.20 | v48.11,41.15 48.23,41.03 | 48.23,41.03 61.09,53.89 65.41,53.89 W5500NIREN.8
WIZ_RST
  Bottom 0.152: W5500NIREN.5 66.95,57.42 65.96,56.43 56.23,56.43 48,48.2 44.69,48.2 43.8,47.31 43.8,43.47 W5100.4 45.09,41.24 44.15,40.3 44.15,39.27 42.6,37.72 42.6,19.43 42,18.83 40.81,18.83 U$1.16

## Text on the board
tNames: +5V | GND | LAN | CS | RST | GND | VCC | MOSI | MISO | MOSI | SCK | MISO | IN | VCC | CS | OUT | GND | W5100 | VCC | GND | 5V | MAPLE CUN Lage Version A 1.2 | MAPLE CUN Lage Version A 1.2 | www.neuby.de | 31 (PB12) | + | TX | RX | GND | VCC | GND | GND | + | RX | TX
bNames: MAPLE CUN Lage Version A 1.1